# Altium PCB Main.PcbDoc
Units mm, origin at the board's own origin, x right, y up, seen from the top; angles counter-clockwise.
Board outline 21.78 x 23 mm, 2 copper layers (Top Layer, Bottom Layer), stack 1.135 mm thick; 5 components, 16 nets, 36 pads, 8 vias.
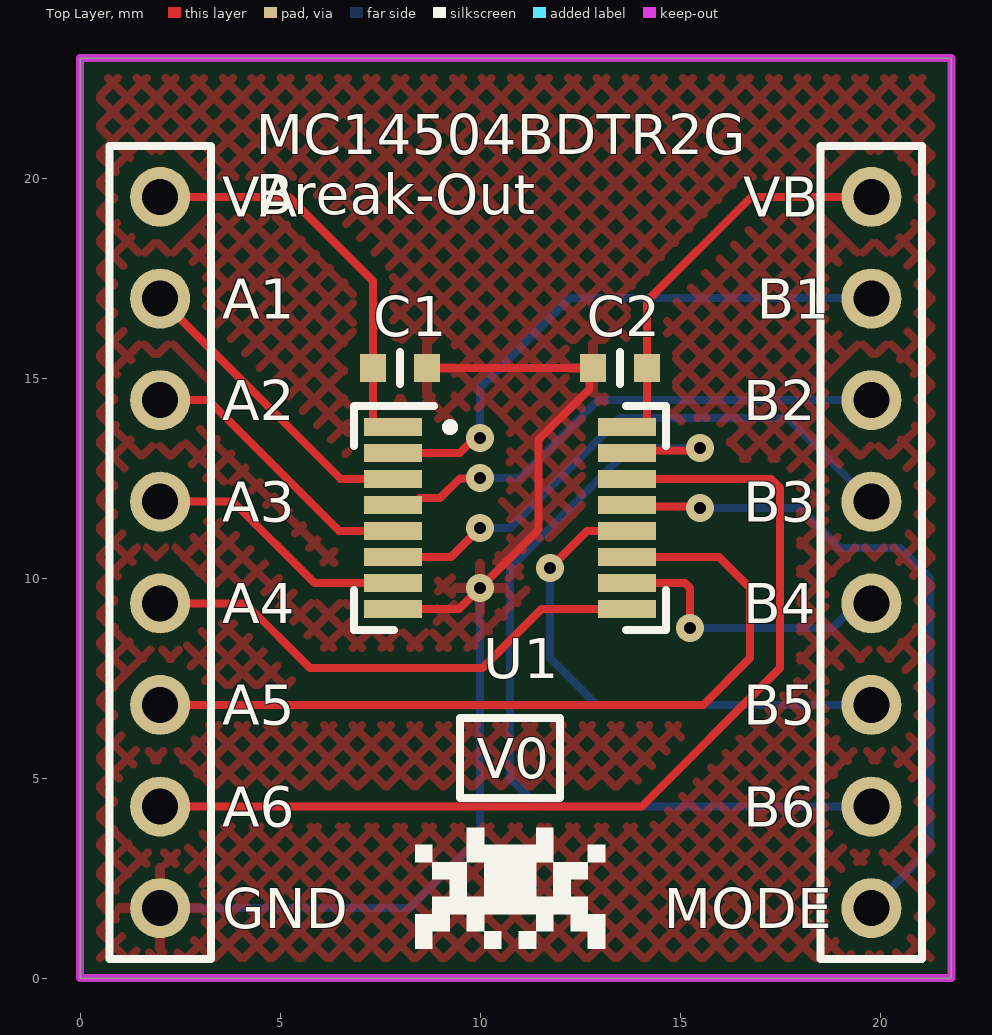
[diagram p0: Top Layer view]
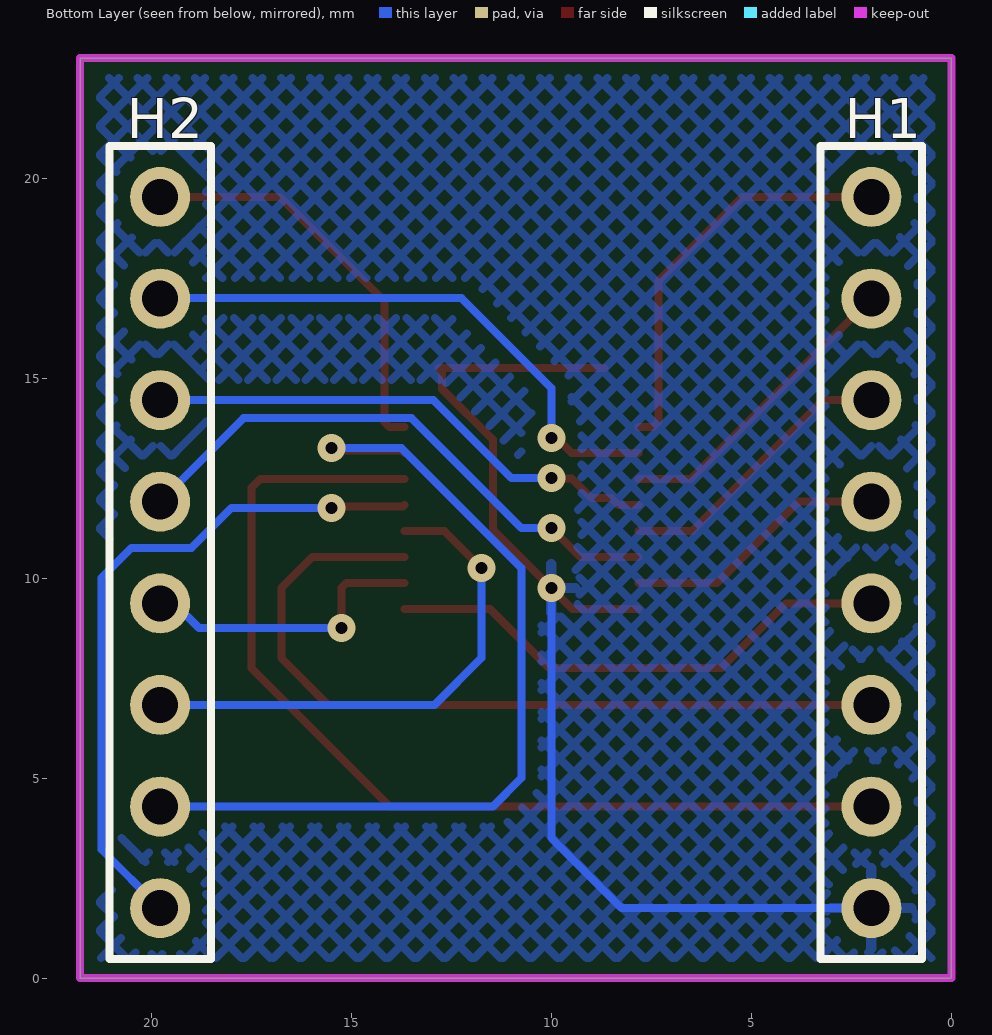
[diagram p1: Bottom Layer view, seen from below]
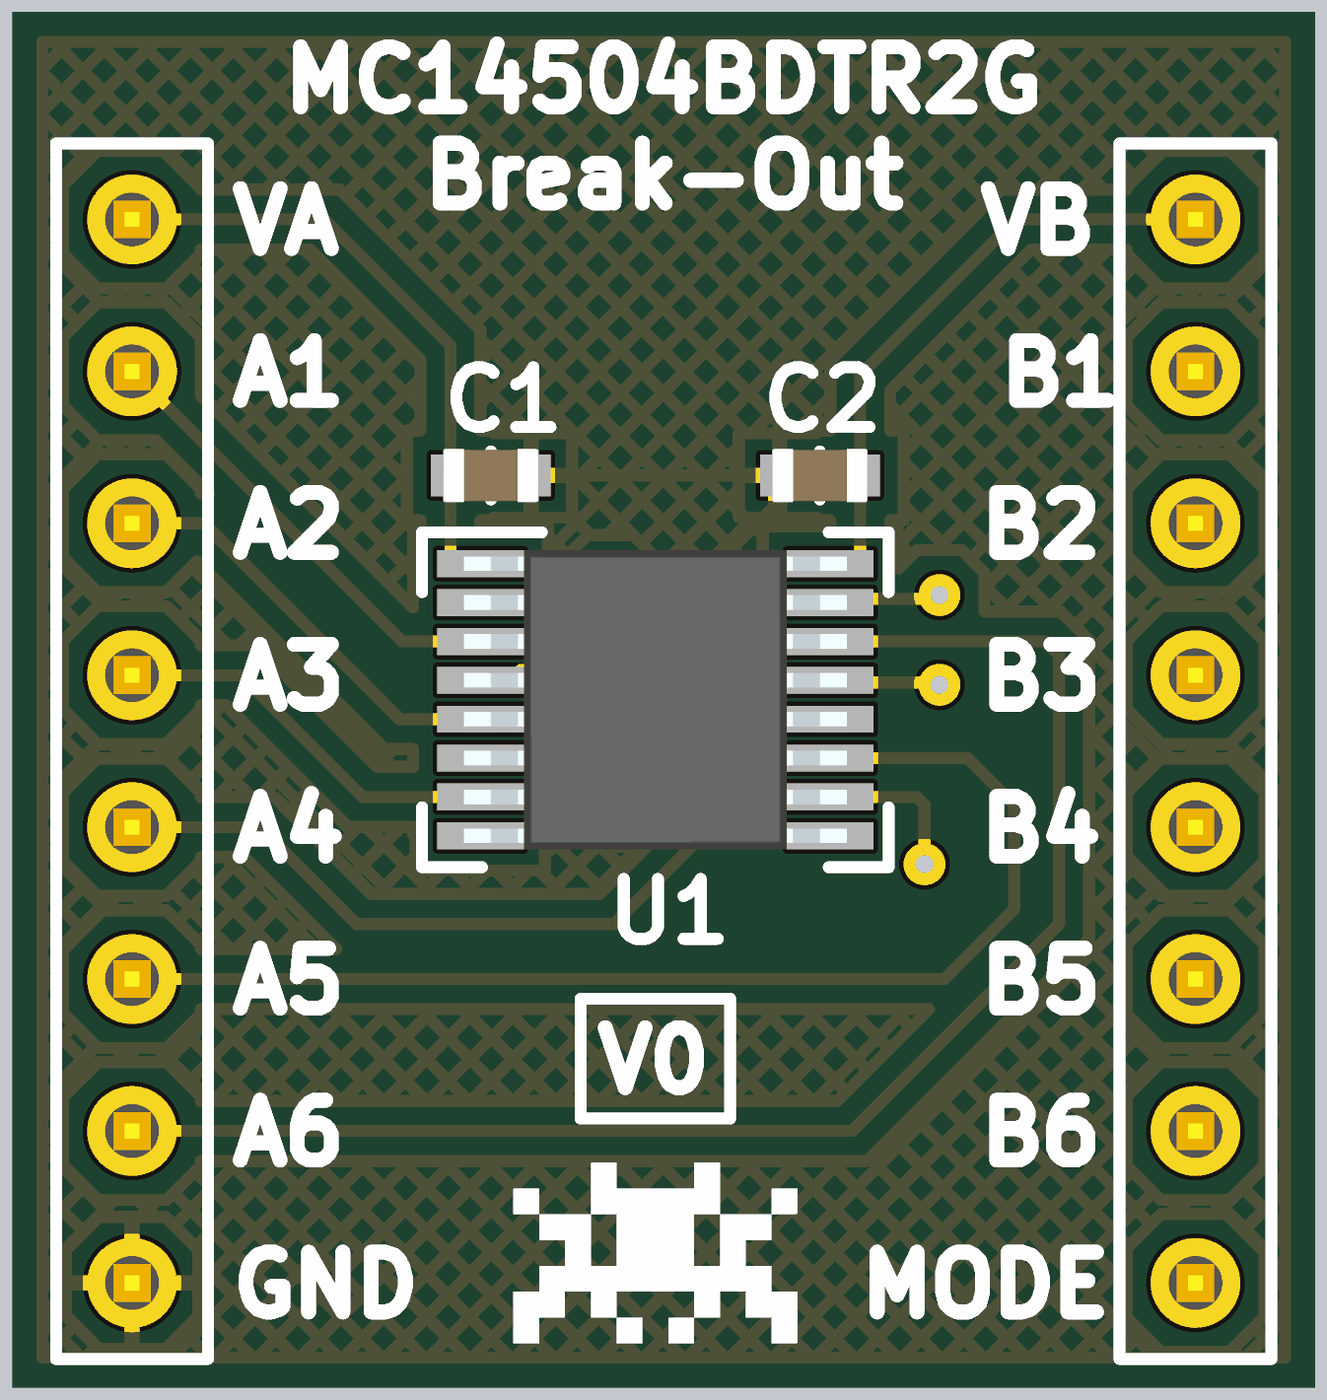
[diagram p2: 3D render of the assembled board from above, using the file's embedded part models]

## Layer stack, top to bottom
Top Solder: solder mask 0.0102, Solder Resist, Dk 3.8
Top Layer: signal copper 0.035
Dielectric 1: dielectric 1.065, FR-4, Dk 4.8
Bottom Layer: signal copper 0.035
Bottom Solder: solder mask 0.0102, Solder Resist, Dk 3.8

## Board outline
0,0 0,23 21.78,23 21.78,0

## Design rules (kind name [scope] priority, off if disabled: settings)
BoardOutlineClearance [All] p1: gap=0.2 ignorepadtopadclearanceinfootprint=FALSE
Clearance "inPolygon Clearance" [InPolygon] p1: gap=0.3 ignorepadtopadclearanceinfootprint=TRUE // this rule ensures that every net within a polygon of a different net has a set clearance from the poly
Clearance "Different Diff Pair" [All] p2: gap=0.2 ignorepadtopadclearanceinfootprint=TRUE
Clearance "Same Diff Pair" [All] p3: gap=0.1 ignorepadtopadclearanceinfootprint=TRUE
Clearance "Different Nets" [not InAnyDifferentialPair] p4: gap=0.3 ignorepadtopadclearanceinfootprint=TRUE except(0.1: Arc-SMDPad Arc-THPad Arc-Via Arc-Text Track-SMDPad Track-THPad Track-Via Track-Text SMDPad-Text THPad-Text Via-Text Fill-Text Poly-Text Region-Text Text-Text; 0.12: Arc-Arc Arc-Track Track-Track; 0.15: SMDPad-SMDPad SMDPad-THPad SMDPad-Via THPad-THPad THPad-Via Via-Via; 0.2: Arc-Hole Track-Hole SMDPad-Hole THPad-Hole Via-Hole Fill-Hole Poly-Hole Region-Hole Text-Hole)
Clearance "Same Net" [not InAnyDifferentialPair] p5: gap=0 ignorepadtopadclearanceinfootprint=TRUE except(0.1: THPad-Via; 0.18: Arc-Arc Arc-Track Track-Track)
ComponentClearance [All] p1: gap=0.102 collisioncheckmode=3 verticalgap=0.102 showdistances=TRUE
DiffPairsRouting "Ethernet Routing" [InDifferentialPairClass('Ethernet_Pairs')] p1: maxlimit=0.2 minlimit=0.2 mostfreqgap=0.2 toplayer_minwidth=0.25 toplayer_maxwidth=0.25 toplayer_prefwidth=0.25 bottomlayer_minwidth=0.25 bottomlayer_maxwidth=0.25 bottomlayer_prefwidth=0.25 impedanceprofiledriven=TRUE maxuncoupledlength=12.7
DiffPairsRouting "USB Routing" [InDifferentialPairClass('USB_Pairs')] p2: maxlimit=0.127 minlimit=0.127 mostfreqgap=0.127 toplayer_minwidth=0.23 toplayer_maxwidth=0.23 toplayer_prefwidth=0.23 bottomlayer_minwidth=0.23 bottomlayer_maxwidth=0.23 bottomlayer_prefwidth=0.23 impedanceprofiledriven=TRUE maxuncoupledlength=12.7
DiffPairsRouting "CAN Routing" [InDifferentialPairClass('CAN_Pairs')] p3: maxlimit=0.5 minlimit=0.5 mostfreqgap=0.5 toplayer_minwidth=0.201 toplayer_maxwidth=0.201 toplayer_prefwidth=0.201 bottomlayer_minwidth=0.201 bottomlayer_maxwidth=0.201 bottomlayer_prefwidth=0.201 impedanceprofiledriven=TRUE maxuncoupledlength=12.7
Height [All] p1: minheight=0 maxheight=1816.048 prefheight=12.7
HoleSize [All] p1: absolutevalues=TRUE maxlimit=6.3 minlimit=0.3 maxpercent=80.000 minpercent=20.000
HoleToHoleClearance [All] p1: gap=0.25 allowstackedmicrovias=FALSE
Length [All] p1: maxlimit=43.432 minlimit=0 usedelayunits=TRUE mindelay=0.000000 maxdelay=10000.000000
MatchedLengths "Diff Pair Matched Delays" [InDifferentialPairClass('Ethernet_Pairs') or InDifferentialPairClass('USB_Pairs') or InDifferentialPairClass('CAN_Pairs')] p1: tolerance=5 checknetsindiffpair=TRUE checkdiffpairvsdiffpair=FALSE checkxsignals=FALSE checkothers=FALSE usedelayunits=TRUE delaytolerance=100.000000
MinimumAnnularRing [All] p1: minimumring=0.2
MinimumSolderMaskSliver [All] p1: minsoldermaskwidth=0
PlaneClearance "Supply Net Clearance" [InNetClass('Supply_Nets')] p1: clearance=0.5
PlaneClearance "All Nets" [All] p2: clearance=0.3
PolygonConnect "Supply Nets" [InNetClass('Supply_Nets')] p1: connectstyle=Relief reliefconductorwidth=0.3 reliefentries=4 polygonreliefangle="90 Angle" conductorbypadedge=TRUE mindistance=0.381 enablemindistance=FALSE airgapwidth=0.254
PolygonConnect General [All] p2: connectstyle=Relief reliefconductorwidth=0.254 reliefentries=4 polygonreliefangle="90 Angle" airgapwidth=0.254
RoutingVias [All] p1: holewidth=0.2 width=0.35 viastyle="Through Hole" minholewidth=0.15 minwidth=0.3 maxholewidth=6.3 maxwidth=6.55
SilkToSilkClearance [All] p1: silktosilkclearance=0
SilkToSolderMaskClearance [All] p1: minsilkscreentomaskgap=0 clearancetoexposedcopper=TRUE
SolderMaskExpansion [All] p1: expansion=0.075 istentingtop=FALSE
SupplyNets "Schematic Supply Nets_3" [InNet('GND')] p1: voltage=0.000
UnRoutedNet [All] p1: checkbadconnections=TRUE
Width "nRF Width" [InNetClass('nRF Signal')] p1: maxlimit=0.379 minlimit=0.379 preferedwidth=0.379 impedanceprofiledriven=TRUE minimp=50.000000 maximp=50.000000 favimp=50.000000 checkconnectedcopper=TRUE
Width [All] p2: maxlimit=100 minlimit=0.1 preferedwidth=0.3
20 further rules are at their usual default settings.

## Components (designator, comment, footprint, x,y, rotation, side; value= is the part's Value field where it differs from the comment)
C1 "[Cap] 0603 0.1uF 10% 16V" "[Cap] SMD 0603" 8,15.25 r180 top
C2 "[Cap] 0603 0.1uF 10% 16V" "[Cap] SMD 0603" 13.5,15.25 r0 top
H1 "1x8 Header" "[Header] 1x8 Male" 2,19.53 r270 bottom
H2 "1x8 Header" "[Header] 1x8 Male" 19.78,19.53 r270 bottom
U1 "[Level Shifter] 3-18V Unidirectional" "[Level Shifter] 3-18V Unidirectional" 10.75,11.5 r0 top

## Footprints (in the part's own frame and the unit in brackets; to place one, negate y for a bottom-side part, rotate by r counter-clockwise, add the part's x,y. Pads: shape width x height; smd on the part's side, far side on the other; paste and mask are expansions set on the pad)
"[Cap] SMD 0603" [mm]
  rect 0.65x0.7 smd: 1(-0.675,0) 2(0.675,0)
  silkscreen extent 0,-0.4 0,0.4, body extent -0.8,-0.45 0.8,0.45, height 0.8
"[Header] 1x8 Male" [mm]
  round 1.5 hole 0.9: 1(0,0) 2(2.54,0) 3(5.08,0) 4(7.62,0) 5(10.16,0) 6(12.7,0) 7(15.24,0) 8(17.78,0)
  silkscreen extent -1.27,-1.27 19.05,1.27, body extent -1.27,-1.27 19.05,1.27, height 9.5
"[Level Shifter] 3-18V Unidirectional" [mm]
  rect 1.45x0.45 smd: 1(-2.925,2.275) 2(-2.925,1.625) 3(-2.925,0.975) 4(-2.925,0.325) 5(-2.925,-0.325) 6(-2.925,-0.975) 7(-2.925,-1.625) 8(-2.925,-2.275) 9(2.925,-2.275) 10(2.925,-1.625) 11(2.925,-0.975) 12(2.925,-0.325) 13(2.925,0.325) 14(2.925,0.975) 15(2.925,1.625) 16(2.925,2.275)
  silkscreen extent -3.9,-2.8 3.9,2.8, body extent -3.2,-2.5 3.2,2.5, height 1.2

## Part data
C1 C2: "CC0603KRX7R7BB104", Capacitance=100nF, Max Voltage=16V, Size Package=0603, Supplier Part Number 1=311-1088-6-ND, Tolerance=10%, Supplier 1=DigiKey
H1 H2: library part "[Header] 1x8 Male", "2.54mm pitch"
U1: "MC14504BDTR2G", Supplier Part Number 1=MC14504BDTR2GOSCT-ND, Supplier 1=DigiKey

## Via types
v1: diameter 0.7, hole 0.3, Top Layer to Bottom Layer, 8 vias

## Nets (pads, with @x,y where several pads share a name; then routed paths per layer and width w, separated by ;. In a path a pad name is that pad's centre, name@x,y a point inside that pad or via, vN(x,y) a via of type N, cw(c..) or ccw(c..) an arc to the next point about the centre after c; other vN are vias at no path point)
A1: H1.2 U1.3 | length 7.7
  Top Layer w0.2: H1.2 6.515,12.475 U1.3
A2: H1.3 U1.5 | length 7.2
  Top Layer w0.2: H1.3 3.201,14.45 6.476,11.175 U1.5
A3: H1.4 U1.7 | length 6.7
  Top Layer w0.2: H1.4 3.821,11.91 5.856,9.875 U1.7
A4: H1.5 U1.9 | length 13
  Top Layer w0.2: H1.5 4.13,9.37 5.75,7.75 10.057,7.75 11.532,9.225 U1.9
A5: H1.6 U1.11 | length 20.4
  Top Layer w0.2: H1.6 15.58,6.83 16.75,8 16.75,9.75 15.975,10.525 U1.11
A6: H1.7 U1.14 | length 25.4
  Top Layer w0.2: H1.7 14.04,4.29 17.5,7.75 17.5,12.25 17.275,12.475 U1.14
B1: H2.2 U1.2 | length 14.3
  Top Layer w0.2: U1.2 9.49,13.125 9.865,13.5 v1(10,13.5)
  Bottom Layer w0.2: v1(10,13.5) 10,14.75 12.25,17 19.77,17 H2.2
B2: H2.3 U1.4 | length 13
  Top Layer w0.2: U1.4 8.325,11.825 8.5,12 9,12 9.495,12.495 9.995,12.495 v1(10,12.5)
  Bottom Layer w0.2: v1(10,12.5) 11,12.5 12.95,14.45 H2.3
B3: H2.4 U1.6 | length 14.3
  Top Layer w0.2: U1.6 9.275,10.525 v1(10,11.25)
  Bottom Layer w0.2: v1(10,11.25) 10.75,11.25 13.5,14 17.69,14 H2.4
B4: H2.5 U1.10 | length 7.4
  Top Layer w0.2: U1.10 15.125,9.875 15.25,9.75 v1(15.25,8.75)
  Bottom Layer w0.2: v1(15.25,8.75) 18.808,8.75 19.428,9.37 H2.5
B5: H2.6 U1.12 | length 13.1
  Top Layer w0.2: v1(11.75,10.25) 12.675,11.175 U1.12
  Bottom Layer w0.2: v1(11.75,10.25) 11.75,8 12.92,6.83 H2.6
B6: H2.7 U1.15 | length 22.4
  Top Layer w0.2: U1.15 13.737,13.187 15.438,13.187 v1(15.5,13.25)
  Bottom Layer w0.2: v1(15.5,13.25) 13.75,13.25 10.75,10.25 10.75,5 11.46,4.29 H2.7
GND: C1.1 C2.1 H1.8 U1.8 | length 28.2
  Top Layer w0.2: U1.8 9.475,9.225 v1(10,9.75) 11.46,11.21 11.46,13.46 12.731,14.731 12.731,15.156 C2.1 C1.1
  Bottom Layer w0.2: H1.8 8.25,1.75 10,3.5 v1(10,9.75)
MODE: H2.8 U1.13 | length 17.2
  Top Layer w0.2: U1.13 13.712,11.787 15.462,11.787 v1(15.5,11.75)
  Bottom Layer w0.2: v1(15.5,11.75) 18,11.75 19,10.75 20.5,10.75 21.25,10 21.25,3.22 H2.8
VA: C1.2 H1.1 U1.1 | length 10.3
  Top Layer w0.2: H1.1 5.22,19.53 7.325,17.425 C1.2 7.325,13.9 7.45,13.775 U1.1
VB: C2.2 H2.1 U1.16 | length 10.3
  Top Layer w0.2: U1.16 14.05,13.775 14.175,13.9 C2.2 14.175,16.925 16.78,19.53 H2.1

## Polygon pours and split planes (outlines as drawn)
GND on Top Layer "GND Top" (hatched 45Degree grid 0.508 track 0.203, remove dead copper, pour order 0): 0,23 21.78,23 21.78,0 0,0
GND on Bottom Layer "GND Top" (hatched 45Degree grid 0.508 track 0.203, remove dead copper, pour order 1): 0,23 21.78,23 21.78,0 0,0

## Keep-outs
Keep-Out Layer:
  the board outline again, w0.2

## Silkscreen, mask and mechanical layers (free items; w line width, h text height)
Top Overlay:
  region: 10.264,0.739 10.103,0.739 10.103,1.171 10.534,1.171 10.534,1.17 10.534,0.739 10.264,0.739
  region: 8.375,3.209 8.375,3.33 8.807,3.33 8.807,3.329 8.807,2.898 8.375,2.898 8.375,3.208
  region: 12.693,3.031 12.693,3.329 12.694,3.329 12.694,3.33 13.125,3.33 13.125,2.898 12.693,2.898 12.693,3.03
  region: 11.398,1.136 11.398,0.739 10.966,0.739 10.966,1.17 10.967,1.17 10.967,1.171 11.398,1.171 11.398,1.137
  region: 9.678,3.761 10.103,3.761 10.103,3.33 11.398,3.33 11.398,3.761 11.83,3.761 11.83,2.898 11.398,2.898 11.398,2.034 11.83,2.034 11.83,2.898 12.693,2.898 12.693,2.467 12.693,2.466 12.262,2.466 12.262,2.034 12.693,2.034 12.693,1.602 13.125,1.602 13.125,0.739 12.693,0.739 12.693,1.171 12.262,1.171 12.262,1.602 11.83,1.602 11.83,1.171 11.829,1.171 11.398,1.171 11.398,1.602 10.103,1.602 10.103,1.171 9.671,1.171 9.671,1.602 9.239,1.602 9.239,1.171 9.238,1.171 8.807,1.171 8.807,0.739 8.375,0.739 8.375,1.602 8.807,1.602 8.807,2.034 8.808,2.034 9.239,2.034 9.239,2.466 8.808,2.466 8.808,2.467 8.807,2.467 8.807,2.898 9.671,2.898 9.671,2.034 10.103,2.034 10.103,2.898 9.671,2.898 9.671,3.761 9.678,3.761
  lines w0.2: 9.5,4.5 12,4.5 12,6.5 9.5,6.5 9.5,4.5
  text "MC14504BDTR2G / Break-Out" at 4.392,19.1 h1
  text "VA" at 3.55,19.03 h1
  text "VB" at 16.584,19.03 h1
  text "A1" at 3.55,16.49 h1
  text "B1" at 16.917,16.49 h1
  text "A2" at 3.55,13.95 h1
  text "B2" at 16.584,13.95 h1
  text "A3" at 3.55,11.41 h1
  text "B3" at 16.584,11.41 h1
  text "A4" at 3.55,8.87 h1
  text "B4" at 16.584,8.87 h1
  text "A5" at 3.55,6.33 h1
  text "B5" at 16.584,6.33 h1
  text "V0" at 9.917,5 h1
  text "A6" at 3.55,3.79 h1
  text "B6" at 16.584,3.79 h1
  text "GND" at 3.55,1.25 h1
  text "MODE" at 14.585,1.25 h1